# Altium PCB Main Board Rev2_1_1.PcbDoc
Units mm, origin at the board's own origin, x right, y up, seen from the top; angles counter-clockwise.
Board outline 113.16 x 41.4 mm, 2 copper layers (Top Layer, Bottom Layer); 32 components, 55 nets, 131 pads, 7 vias.
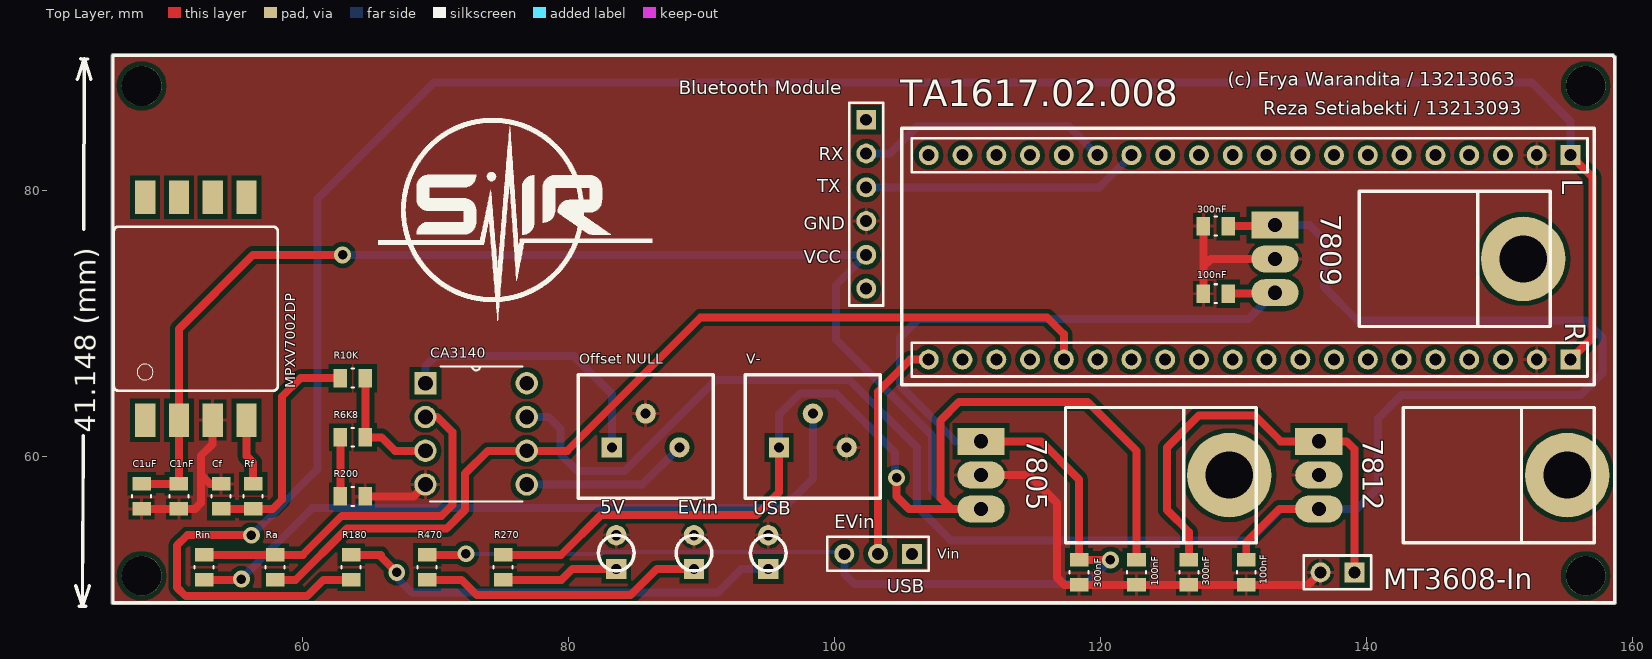
[diagram p0: Top Layer view]
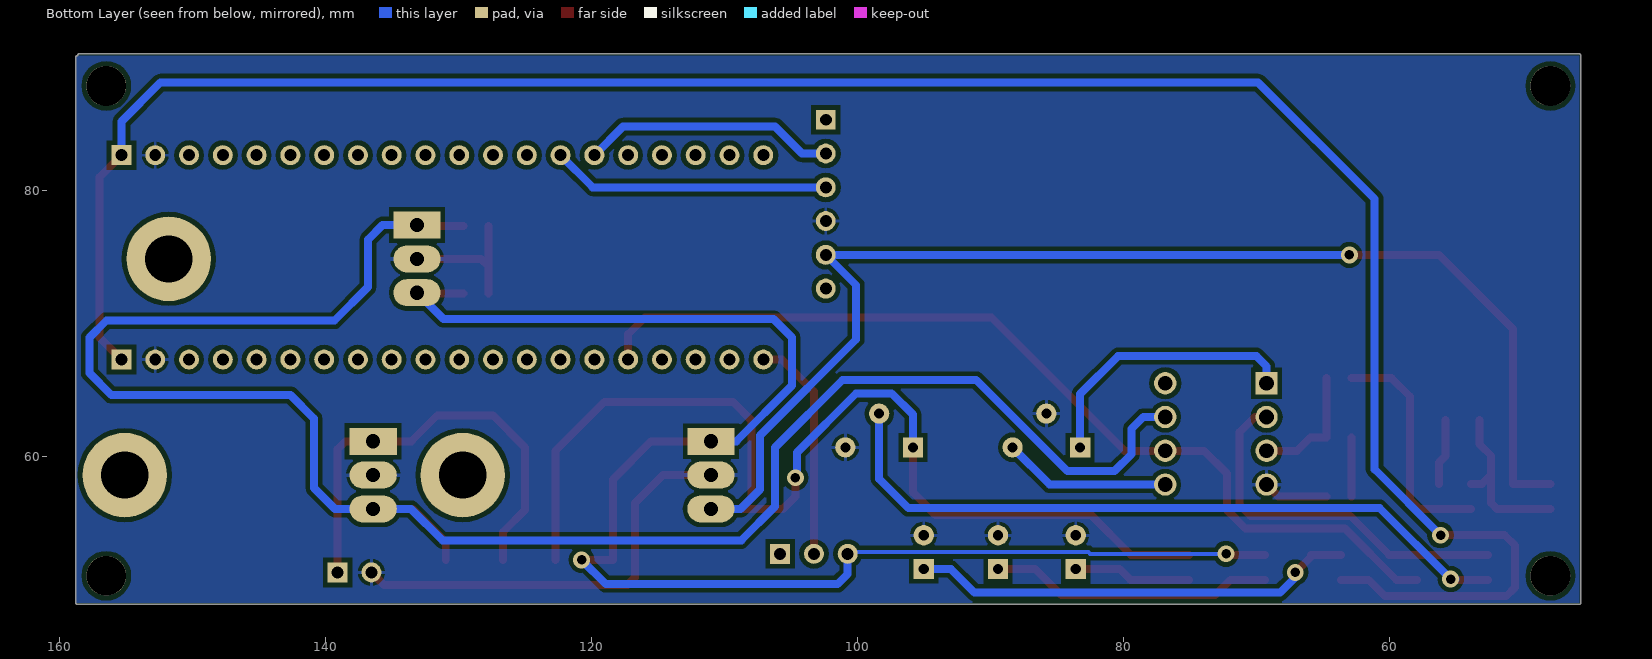
[diagram p1: Bottom Layer view, seen from below]

## Layer stack, top to bottom
Top Solder: solder mask 0.0102, Solder Resist, Dk 3.5
Top Layer: signal copper 0.0356
Dielectric 1: dielectric 0.32, FR-4, Dk 4.8
Bottom Layer: signal copper 0.0356
Bottom Solder: solder mask 0.0102, Solder Resist, Dk 3.5

## Board outline
45.72,48.895 cw(c45.72,49.022) 45.593,49.022 45.593,90.17 cw(c45.72,90.17) 45.72,90.297 158.496,90.297 cw(c158.496,90.17) 158.623,90.17 cw(c158.623,90.043) 158.75,90.043 158.75,49.022 cw(c158.623,49.022) 158.623,48.895

## Design rules (kind name [scope] priority, off if disabled: settings)
Clearance [All] p1: gap=0.35
PlaneClearance [All] p1: clearance=1
PolygonConnect [All] p1: connectstyle=Relief reliefconductorwidth=0.254 reliefentries=4 polygonreliefangle="90 Angle" airgapwidth=0.254
RoomDefinition "Main Board Rev2" [InComponentClass('Main Board Rev2')] p1: confinementstyle=ConfineIn formatcopy=TRUE lockcomponents=FALSE outline 45.72,49.022 158.75,49.022 158.75,90.17 45.72,90.17
RoutingVias [All] p1: holewidth=0.711 width=1.27 viastyle="Through Hole" minholewidth=0.711 minwidth=1.27 maxholewidth=0.711 maxwidth=1.27
SolderMaskExpansion [All] p1: expansion=0.102
Width [All] p1: maxlimit=1 minlimit=0.3 preferedwidth=0.7
29 further rules are at their usual default settings.

## Classes and differential pairs
component class "Main Board Rev2": 5V 100nF 300nF 7805 7809 7812 "Bluetooth Module" C1nF C1uF CA3140 Cf EVin L MT3608-In "Offset NULL" R R6K8 R10K R200 Ra Rf Rin USB V- Vin

## Components (designator, comment, footprint, x,y, rotation, side; value= is the part's Value field where it differs from the comment)
5V "LED kecil" "LED kecil" 81.026,54.1 r90 top
100nF "ERA-6AEB103V" RESC2013X65N 122.682,51.308 r270 top
100nF "ERA-6AEB103V" RESC2013X65N 130.937,51.308 r270 top
100nF "ERA-6AEB103V" RESC2013X65N 128.651,72.263 r180 top
300nF "ERA-6AEB103V" RESC2013X65N 118.364,51.308 r270 top
300nF "ERA-6AEB103V" RESC2013X65N 128.651,77.343 r180 top
300nF "ERA-6AEB103V" RESC2013X65N 126.619,51.308 r270 top
7805 "78XX/79XX" 78XX/79XX 117.094,70.866 r0 top
7809 "78XX/79XX" 78XX/79XX 139.192,87.122 r0 top
7812 "78XX/79XX" 78XX/79XX 142.494,70.866 r0 top
"Bluetooth Module" "Header 6" HDR1X6 102.362,85.344 r270 top (schematic designator BT)
C1nF "ERA-6AEB103V" RESC2013X65N 50.673,57.023 r270 top
C1uF "ERA-6AEB103V" RESC2013X65N 47.879,57.023 r270 top
CA3140 "CA3140EZ" DIP254P762X533-8 76.835,57.912 r0 top
Cf "ERA-6AEB103V" RESC2013X65N 53.848,57.023 r90 top
EVin "LED kecil" "LED kecil" 86.868,54.1 r90 top
L "Header 20" HDR1X20 155.321,82.677 r180 top
MT3608-In "Header 2" HDR1X2 139.065,51.308 r180 top
"Offset NULL" "Trimpot" "Trimpot Duduk" 88.138,63.246 r90 top
R "Header 20" HDR1X20 155.321,67.31 r180 top
R6K8 "ERA-6AEB103V" RESC2013X65N 63.754,61.468 r180 top
R10K "ERA-6AEB103V" RESC2013X65N 63.754,65.913 r0 top
R180 "Comment" RESC2013X65N 63.627,51.689 r90 top
R200 "ERA-6AEB103V" RESC2013X65N 63.754,57.023 r0 top
R270 "Comment" RESC2013X65N 75.057,51.689 r90 top
R470 "Comment" RESC2013X65N 69.342,51.689 r90 top
Ra "ERA-6AEB103V" RESC2013X65N 57.912,51.689 r270 top
Rf "ERA-6AEB103V" RESC2013X65N 56.261,57.023 r90 top
Rin "ERA-6AEB103V" RESC2013X65N 52.578,51.689 r270 top
USB "LED kecil" "LED kecil" 92.456,54.1 r90 top (schematic designator UVin)
V- "Trimpot" "Trimpot Duduk" 100.711,63.246 r90 top
Vin "Header 3" HDR1X3 105.791,52.705 r180 top

## Footprints (in the part's own frame and the unit in brackets; to place one, negate y for a bottom-side part, rotate by r counter-clockwise, add the part's x,y. Pads: shape width x height; smd on the part's side, far side on the other; paste and mask are expansions set on the pad)
78XX/79XX [mil]
  round 250 hole 140: 0(495,-482)
  rect 140x80 hole 42: 1(-240,-382)
  oval 140x80 hole 42: 2(-240,-482) 3(-240,-582)
  silkscreen extent 10,-682 575,-282
DIP254P762X533-8 [mil]
  rect 66x66 hole 44: 1(-300,300)
  round 66 hole 44: 2(-300,200) 3(-300,100) 4(-300,0) 5(0,0) 6(0,100) 7(0,200) 8(0,300)
  silkscreen extent -287,-50 -13,350
HDR1X2 [mm] "Connector; Header; 2 Position"
  rect 1.5x1.5 hole 0.9: 1(0,0)
  round 1.5 hole 0.9: 2(2.54,0)
  silkscreen extent -1.27,-1.27 3.81,1.27
HDR1X3 [mm] "Connector; Header; 3 Position"
  rect 1.5x1.5 hole 0.9: 1(0,0)
  round 1.5 hole 0.9: 2(2.54,0) 3(5.08,0)
  silkscreen extent -1.27,-1.27 6.35,1.27
HDR1X6 [mm] "Connector; Header; 6 Position"
  rect 1.5x1.5 hole 0.9: 1(0,0)
  round 1.5 hole 0.9: 2(2.54,0) 3(5.08,0) 4(7.62,0) 5(10.16,0) 6(12.7,0)
  silkscreen extent -1.27,-1.27 13.97,1.27
HDR1X20 [mm] "Connector; Header; 20 Position"
  rect 1.5x1.5 hole 0.9: 1(0,0)
  round 1.5 hole 0.9: 2(2.54,0) 3(5.08,0) 4(7.62,0) 5(10.16,0) 6(12.7,0) 7(15.24,0) 8(17.78,0) 9(20.32,0) 10(22.86,0) 11(25.4,0) 12(27.94,0) 13(30.48,0) 14(33.02,0) 15(35.56,0) 16(38.1,0) 17(40.64,0) 18(43.18,0) 19(45.72,0) 20(48.26,0)
  silkscreen extent -1.27,-1.27 49.53,1.27
"LED kecil" [mil]
  rect 60x60 hole 30: 1(-100,-100)
  round 60 hole 30: 2(0,-100)
  silkscreen extent -106,-153 0,-47
RESC2013X65N [mil]
  rect 40x55 smd: 1(-37,0) 2(37,0)
  silkscreen extent -4,-28 4,28
"Trimpot Duduk" [mil]
  rect 60x60 hole 30: 1(-100,193)
  round 60 hole 30: 2(0,93) 3(-100,-7)
  silkscreen extent -250,-107 115,293

## Part data
100nF 100nF 100nF 300nF 300nF 300nF C1nF C1uF Cf R6K8 R10K R200 Ra Rf Rin: "Res Thin Film 0805 10K Ohm 0.1%25 0.125W%281/8W%29 %C3%98%C2%A2%C3%82%C2%B125ppm/%C3%98%C2%A2%C3%82%C2%B0C Molded SMD Automotive Punched T/R"
7805 7809 7812: library part 7805/7809/7812/7905/7909/7912
"Bluetooth Module": "Header, 6-Pin"
CA3140: "CA140 Series 4.5 MHz 9 V/us 36 V BiMOS Operational Amplifier - PDIP-8"
L R: "Header, 20-Pin"
MT3608-In: "Header, 2-Pin"
"Offset NULL" V-: library part "Trimpot Duduk"
Vin: "Header, 3-Pin"

## Free pads (board coordinates)
  rect 1.524x2.54 smd: 1(48.139,62.753) 2(50.679,62.753) 3(53.219,62.753) 4(55.759,62.753) 5(55.759,79.517) 6(53.219,79.517) 7(50.679,79.517) 8(48.139,79.517)
  round 3 hole 3: 12(47.879,51.054) 12(47.879,87.884) 12(156.464,51.054) 12(156.464,87.884)

## Via types
v1: diameter 1.27, hole 0.711, Top Layer to Bottom Layer, 7 vias

## Nets (pads, with @x,y where several pads share a name; then routed paths per layer and width w, separated by ;. In a path a pad name is that pad's centre, name@x,y a point inside that pad or via, vN(x,y) a via of type N, cw(c..) or ccw(c..) an arc to the next point about the centre after c; other vN are vias at no path point)
3V3: L.1 R180.1 R.1 | length 168.6
  Top Layer w0.6: v1(56.134,54.102) 51.308,54.102 50.546,53.34 50.546,50.165 51.196,49.515 60.31,49.515 61.544,50.749 R180.1 ; R.1 156.972,68.961 156.972,81.026 L.1
  Bottom Layer w0.6: v1(56.134,54.102) 61.087,59.055 61.087,79.375 69.85,88.138 152.4,88.138 155.321,85.217 L.1
5V: 100nF.1@122.682,52.248 7805.3 "Bluetooth Module.5" C1nF.1 C1uF.1 pad.2 R270.2 V-.1 | length 176.6
  Top Layer w0.6: C1uF.1 C1nF.1 ; C1nF.1@50.679,57.968 pad.2 50.679,69.602 56.261,75.184 v1(62.992,75.184) ; R270.2 79.426,52.629 82.423,55.626 94.107,55.626 95.809,57.328 V-.1 ; v1(104.648,58.42) 104.648,57.023 105.588,56.083 108.763,56.083 ; 7805.3 108.763,56.083 ; 100nF.1@122.682,52.248 122.682,60.452 118.999,64.135 109.347,64.135 107.95,62.738 107.95,56.896 108.763,56.083
  Bottom Layer w0.6: v1@62.865,75.057 v1(62.992,75.184) 102.362,75.184 100.076,72.898 100.076,68.834 107.315,61.595 107.315,57.531 108.763,56.083 7805.3 ; V-.1 95.809,63.17 97.409,64.77 100.076,64.77 104.521,60.325 v1@104.521,58.166
BATERAI+: 300nF.1@126.619,52.248 7812.1 MT3608-In.1 | length 34.6
  Top Layer w0.6: 300nF.1@126.619,52.248 126.619,54.356 124.968,56.007 124.968,60.706 127.381,63.119 131.572,63.119 133.528,61.163 7812.1 138.481,61.163 139.065,60.579 MT3608-In.1
EN: "Bluetooth Module.6"
GND: 5V.2 100nF.2 300nF.2 7805.2 7809.2 7812.2 "Bluetooth Module.4" "Offset NULL.2" C1nF.2 C1uF.2 CA3140.4 Cf.2 EVin.2 L.2 MT3608-In.2 pad.3 R200.2 R.2 USB.2 V-.3 | length 61.3
  Top Layer w0.6: C1uF.2 C1nF.2 51.892,56.083 52.324,56.515 52.324,58.674 ; pad.3 53.219,60.966 52.324,60.071 52.324,58.674 ; Cf.2 53.035,57.963 52.324,58.674 ; R200.2 68.326,57.023 CA3140.4 ; 7805.2 114.605,58.623 116.713,56.515 116.713,50.927 117.272,50.368 118.364,50.368 122.682,50.368 126.619,50.368 130.937,50.368 135.585,50.368 MT3608-In.2 ; 100nF.2@127.711,72.263 127.711,74.295 ; 300nF.2@127.711,77.343 127.711,74.295 ; 7809.2 128.295,74.879 127.711,74.295
Net5V_1: 5V.1 R270.1 | length 8.8
  Top Layer w0.6: R270.1 79.451,50.749 80.262,51.56 5V.1
NetCA3140_3: CA3140.3 R6K8.1 R10K.2 | length 9.4
  Top Layer w0.6: R10K.2 R6K8.1 65.913,61.468 66.929,60.452 CA3140.3
NetEVin_1: EVin.1 R470.1 | length 21.4
  Top Layer w0.6: R470.1 71.933,50.749 73.091,49.591 84.643,49.591 86.612,51.56 EVin.1
NetR6K8_2: R6K8.2 R200.1 | length 4.4
  Top Layer w0.6: R200.1 R6K8.2
NetRin_2: Rin.2 V-.2 | length 54.2
  Top Layer w0.6: Rin.2 55.321,50.749 v1(55.372,50.8)
  Bottom Layer w0.6: v1@54.991,50.8 v1(55.372,50.8) 60.706,56.134 96.139,56.134 98.349,58.344 V-.2
NetRVin_1: R180.2 USB.1 | length 33.4
  Top Layer w0.6: R180.2 65.862,52.629 65.862,52.502 v1(67.056,51.308)
  Bottom Layer w0.6: v1@66.929,51.054 68.199,49.784 91.186,49.784 92.962,51.56 USB.1
OFFSET1: "Offset NULL.1" CA3140.1 | length 20.8
  Bottom Layer w0.6: CA3140.1 69.215,66.802 69.977,67.564 80.391,67.564 83.236,64.719 83.236,60.706
OFFSET2: "Offset NULL.3" CA3140.5 | length 12.6
  Bottom Layer w0.6: CA3140.5 85.522,57.912 88.316,60.706
OUT: pad.4 Rf.2 | length 5
  Top Layer w0.6: pad.4 55.759,60.065 56.261,59.563 Rf.2
OUT9: 100nF.1@129.591,72.263 300nF.1@118.364,52.248 7805.1 7809.3 R470.2 Vin.3 | length 116
  Top Layer w0.3: v1@72.187,52.629 v1(72.263,52.705)
  Top Layer w0.6: R470.2 v1@72.187,52.629 ; 7805.1 115.494,61.163 118.364,58.293 118.364,52.248 v1(120.726,52.248) ; 100nF.1@129.591,72.263 7809.3@133.02,72.263
  Bottom Layer w0.3: v1@71.882,52.705 v1(72.263,52.705) 82.479,52.705 82.597,52.822 100.711,52.822 Vin.3
  Bottom Layer w0.6: Vin.3 100.711,51.181 101.473,50.419 118.897,50.419 v1(120.726,52.248) ; 7805.1 109.09,61.163 104.902,65.351 104.902,68.961 106.299,70.358 131.115,70.358 7809.3
OUT12: 100nF.1@130.937,52.248 300nF.1@129.591,77.343 7809.1 7812.3 CA3140.7 | length 146.6
  Top Layer w0.6: 300nF.1@129.591,77.343 7809.1@133.02,77.343 ; 100nF.1@130.937,52.248 130.937,53.594 133.426,56.083 7812.3
  Bottom Layer w0.6: CA3140.7 78.486,62.992 79.375,62.103 79.375,60.198 80.645,58.928 84.201,58.928 91.059,65.786 101.092,65.786 106.172,60.706 106.172,56.261 108.712,53.721 131.191,53.721 133.553,56.083 7812.3 139.268,56.083 140.843,57.658 140.843,62.865 142.621,64.643 156.083,64.643 157.734,66.294 157.734,68.961 156.464,70.231 139.319,70.231 136.779,72.771 136.779,76.327 135.687,77.419 7809.1
PA0: R.8
PA1: R.9
PA2: R.10
PA3: R.11
PA4: R.12
PA5: R.13
PA6: R.14
PA7: R.15
PA8: L.16
PA9: "Bluetooth Module.2" L.15 | length 19.1
  Bottom Layer w0.6: 102.362,82.804 104.14,82.804 106.172,84.836 117.602,84.836 L.15
PA10: "Bluetooth Module.3" L.14 | length 20.9
  Bottom Layer w0.6: 102.362,80.264 119.888,80.264 L.14
PA11: L.13
PA12: L.12
PA13: L.11
PA14: L.10
PA15: L.9
PB0: CA3140.6 R.16 Ra.2 | length 71.5
  Top Layer w0.6: Ra.2 59.459,50.749 63.319,54.61 70.812,54.61 72.197,55.994 72.197,58.735 73.914,60.452 CA3140.6 79.883,60.452 89.916,70.485 115.951,70.485 117.221,69.215 R.16
PB2: R.17
PB3: L.8
PB4: L.7
PB5: L.6
PB6: L.5
PB7: L.4
PB8: L.3
PB10: R.18
PB11: R.19
PB12: L.20
PB13: L.19
PB14: L.18
PB15: L.17
PC13: R.4
PC14: R.5
PC15: R.6
RESET: R.7
SENSOR: Cf.1 R10K.1 Rf.1 | length 17.5
  Top Layer w0.6: Cf.1 Rf.1@56.185,56.083 ; Rf.1 57.734,56.083 58.42,56.769 58.42,64.516 59.817,65.913 R10K.1
STATE: "Bluetooth Module.1"
V-: CA3140.2 Ra.1 Rin.1 | length 28.2
  Top Layer w0.6: Rin.1 Ra.1 59.995,52.629 62.926,55.56 70.419,55.56 71.247,56.388 71.247,61.849 70.104,62.992 CA3140.2
VBAT: R.3
VIN: R.20 Vin.2 | length 17
  Top Layer w0.6: Vin.2 103.251,64.897 105.664,67.31 R.20
pads on no net: 7805.0 7809.0 7812.0 CA3140.8 Vin.1

## Polygon pours and split planes (outlines as drawn)
GND on Bottom Layer "Bottom Layer-GND" (solid, pour order 2): 45.72,90.17 45.72,49.022 158.75,49.022 158.75,90.17
GND on Top Layer "Top Layer-GND" (solid, pour order 6): 45.72,90.17 45.72,49.022 158.496,49.022 158.75,49.022 158.75,90.17

## Silkscreen, mask and mechanical layers (free items; w line width, h text height)
Top Overlay:
  drawing of 2785 lines, arcs and shapes, not listed
  text "(c) Erya Warandita / 13213063" at 129.54,87.884 h1.02
  text "TA1617.02.008" at 104.902,86.36 h2
  text "Reza Setiabekti / 13213093" at 132.207,85.725 h1.02
  text "RX" at 98.806,82.296 h1
  text "TX" at 98.679,79.883 h1
  text "GND" at 97.663,77.089 h1
  text "VCC" at 97.663,74.549 h1
  text "MPXV7002DP" at 59.442,65.166 h0.76 r90
  text "41.148 (mm)" at 44.388,61.823 h1.52 r89.82
  text "EVin" at 99.949,54.61 h1.02
  text "USB" at 103.886,49.784 h1.02
Mechanical 1:
  region: 56.273,80.025 56.273,77.367 55.251,77.367 55.251,80.025
  region: 53.727,80.025 53.727,77.361 52.711,77.361 52.711,80.025
  region: 51.185,80.025 51.185,77.37 50.171,77.37 50.171,80.025
  region: 55.251,62.242 55.251,64.912 56.268,64.912 56.268,62.242
  region: 52.711,62.241 52.711,64.912 53.727,64.912 53.727,62.241
  region: 50.171,62.228 50.171,64.912 51.185,64.912 51.185,62.228
  region: 48.643,80.025 48.643,77.365 47.631,77.365 47.631,80.025
  region: 47.631,62.23 47.631,64.912 48.641,64.912 48.641,62.23
  lines w0.051: 45.726,67.325 41.789,67.325 ; 45.726,69.865 41.789,69.865 ; 45.726,72.405 41.789,72.405 ; 45.726,74.945 41.789,74.945 ; 41.789,67.325 41.789,69.865 ; 41.789,67.325 41.789,66.69 39.249,67.325 39.249,69.865 41.789,70.5 41.789,69.865 ; 41.789,72.405 41.789,74.945 ; 41.789,72.405 41.789,71.77 39.249,72.405 39.249,74.945 41.789,75.58 41.789,74.945

## Dimensions
45.847,45.847 to 158.623,46.101 on Top Overlay